# Altium PCB barricelli.PcbDoc (part 5 of 5)
Units mm, origin at the board's own origin, x right, y up, seen from the top; angles counter-clockwise.
Board outline 153 x 153 mm, 8 copper layers (Top Layer, PWR, Mid-Layer 1, Mid-Layer 2, Mid-Layer 3, Mid-Layer 4, GND, Bottom Layer); 168 components, 427 nets, 1233 pads, 911 vias.
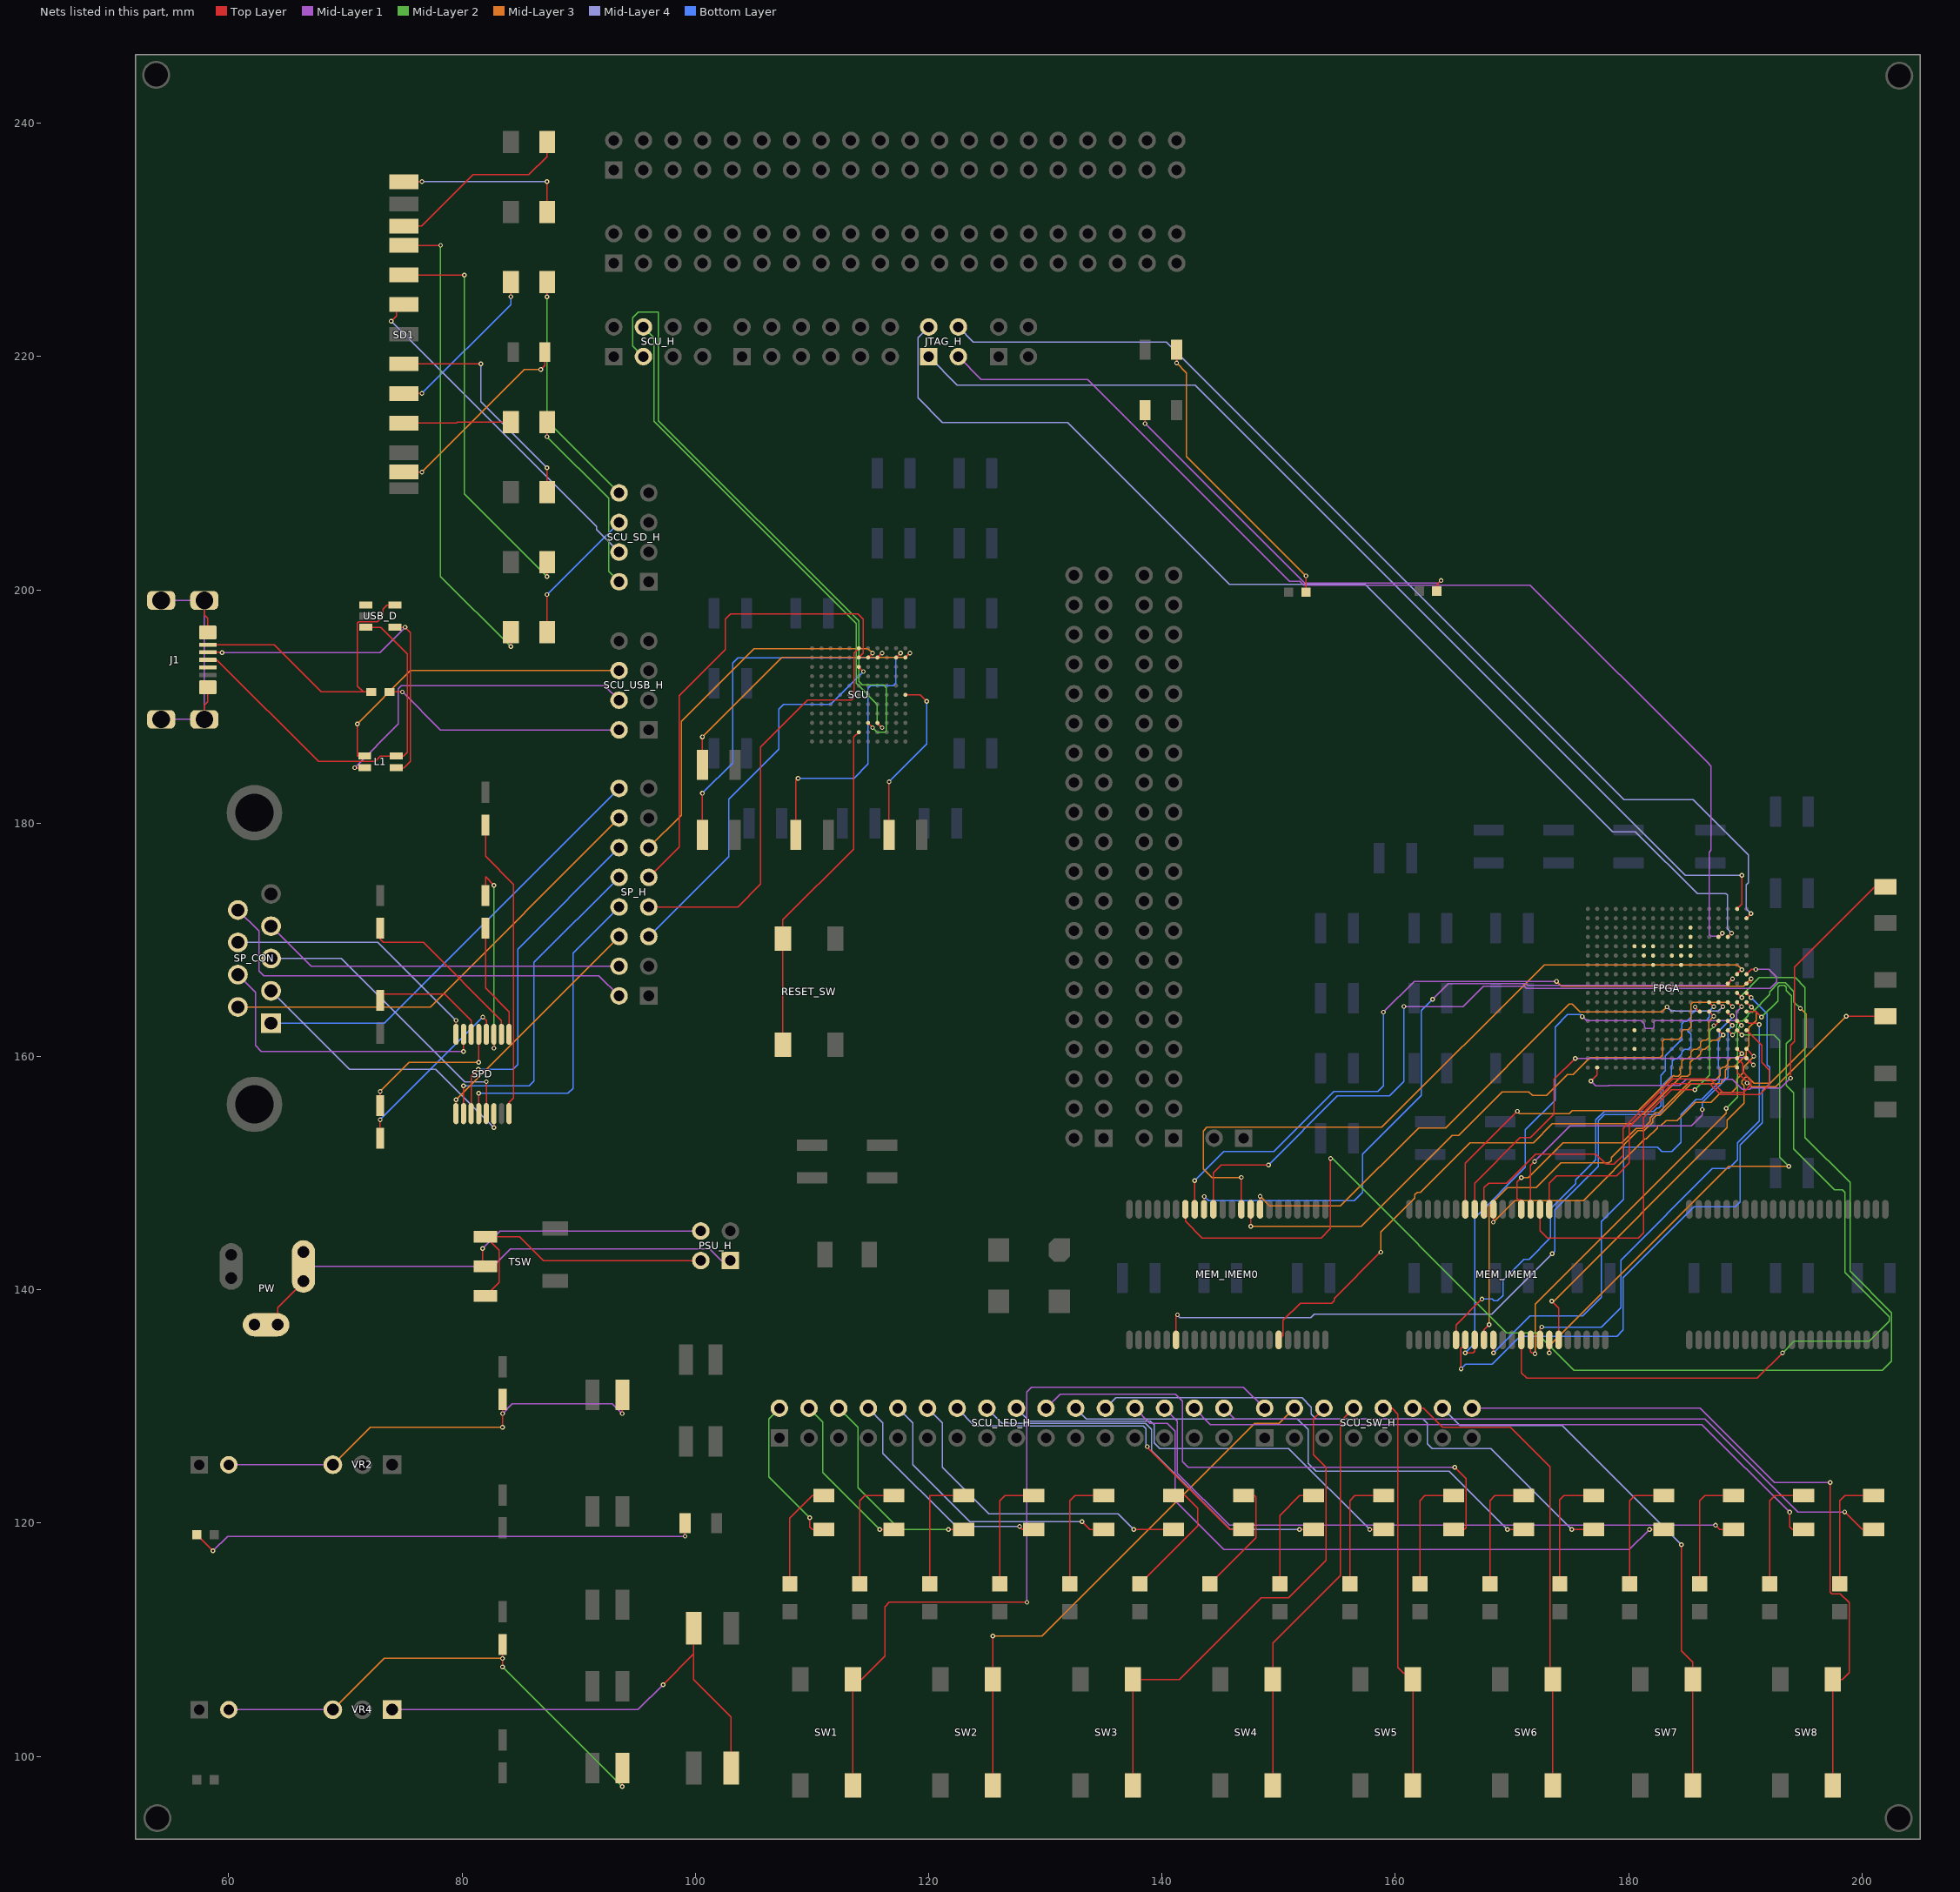
[diagram p11: the nets of this part, all layers, seen from the top]

## Via types
v1: diameter 0.4, hole 0.2, Top Layer to Bottom Layer, tented top, 896 vias
v2: diameter 0.4, hole 0.2, Top Layer to Bottom Layer, 14 vias
v3: diameter 0.6, hole 0.2, Top Layer to Bottom Layer, tented top, 1 vias

## Nets (pads, with @x,y where several pads share a name; then routed paths per layer and width w, separated by ;. In a path a pad name is that pad's centre, name@x,y a point inside that pad or via, vN(x,y) a via of type N, cw(c..) or ccw(c..) an arc to the next point about the centre after c; other vN are vias at no path point) (continued)
INST_MEM0.BUS9: FPGA.L15 MEM_IMEM0.30 | length 49.6
  Top Layer w0.1: MEM_IMEM0.30@148.4,146.9 148.4,147.994 v1(148.412,148.006) ; FPGA.L15@187.7,164.65 v1(188.087,164.262)
  Mid-Layer 3 w0.1: v1(148.412,148.006) 149.225,147.193 155.299,147.193 161.989,153.883 164.296,153.883 174.911,164.497 175.158,164.497 175.826,163.83 182.855,163.83 183.286,164.262 v1(183.3,164.25) v1(183.3,164.25)
  Mid-Layer 4 w0.1: v1(183.3,164.25) v1(183.3,164.25) 183.667,163.881 183.811,163.881 183.855,163.925 183.93,163.925 183.955,163.9 184.17,163.9 184.189,163.881 187.706,163.881 v1(188.087,164.262)
INST_MEM0.BUS10: FPGA.L16 MEM_IMEM0.31 | length 53.8
  Top Layer w0.1: v1(147.6,145.44) MEM_IMEM0.31@147.6,146.9 ; FPGA.L16@188.5,164.65 188.888,164.262 v1(188.9,164.262)
  Mid-Layer 3 w0.1: v1(147.6,145.44) 157.074,145.44 164.88,153.247 165.436,153.247 169.161,156.972 171.43,156.972 171.755,156.647 172.963,156.647 174.771,158.455 175.245,158.455 176.682,159.893 182.677,159.893 182.905,160.122 182.905,161.341 183.032,161.468 184.302,161.468 184.556,161.722 184.556,162.154 184.683,162.281 185.115,162.281 185.344,162.509 185.344,164.49 185.496,164.643 188.519,164.643 v1(188.9,164.262)
INST_MEM0.BUS11: FPGA.H17 MEM_IMEM0.32 | length 62.4
  Top Layer w0.1: MEM_IMEM0.32@146.8,146.9 v1(146.8,149.631) ; FPGA.H17@189.3,167.05 189.712,167.462 v1(189.7,167.45)
  Mid-Layer 3 w0.1: v1(146.8,149.631) 144.272,149.631 143.535,150.368 143.535,153.619 143.84,153.924 158.842,153.924 172.761,167.843 189.332,167.843 189.713,167.462 v1(189.7,167.45)
INST_MEM0.BUS12: FPGA.H18 MEM_IMEM0.35 | length 65.6
  Top Layer w0.1: MEM_IMEM0.35@144.4,146.9 144.4,150.013 145.085,150.698 v1(149.123,150.698) ; FPGA.H18@190.1,167.05 190.512,167.462 v1(190.906,167.462)
  Mid-Layer 1 w0.1: v1(160.731,164.287) 165.791,164.287 167.538,166.034 171.054,166.034 171.257,165.831 192.145,165.831 192.695,166.38 192.695,166.792 192.024,167.462 v1(190.906,167.462)
  Bottom Layer w0.1: v1(149.123,150.698) 155.042,156.616 159.507,156.616 160.731,157.841 v1(160.731,164.287)
INST_MEM0.BUS13: FPGA.J16 MEM_IMEM0.36 | length 61.3
  Top Layer w0.1: MEM_IMEM0.36@143.6,146.9 143.6,147.971 v1(143.623,147.994) ; FPGA.J16@188.5,166.25 v1(188.9,166.649)
  Mid-Layer 1 w0.1: v1(163.195,164.897) 164.532,166.234 171.219,166.234 171.358,166.095 188.345,166.095 v1(188.9,166.649)
  Bottom Layer w0.1: v1(143.623,147.994) 143.993,147.625 156.464,147.625 157.175,148.336 157.175,151.613 162.23,156.667 162.23,163.932 v1(163.195,164.897)
INST_MEM0.BUS14: FPGA.J18 MEM_IMEM0.37 | length 62.1
  Top Layer w0.1: MEM_IMEM0.37@142.8,146.9 v1(142.8,149.352) ; FPGA.J18@190.1,166.25 190.5,166.352 v1(190.5,166.649)
  Mid-Layer 1 w0.1: v1(158.979,163.805) 161.62,166.446 v1(173.812,166.446)
  Mid-Layer 3 w0.1: v1(173.812,166.446) 174.244,166.014 189.865,166.014 v1(190.5,166.649)
  Bottom Layer w0.1: v1(142.8,149.352) 145.289,151.841 149.581,151.841 154.737,156.997 158.496,156.997 158.979,157.48 v1(158.979,163.805)
INST_MEM0.BUS15: FPGA.K17 MEM_IMEM0.38 | length 119.1
  Top Layer w0.1: MEM_IMEM0.38@142,146.9 142,145.898 143.448,144.45 153.641,144.45 154.432,145.241 154.432,151.409 154.45,151.391 v1(154.45,151.25) ; FPGA.K17@189.3,165.45 189.701,165.049 v1(189.713,165.049)
  Mid-Layer 2 w0.1: v1(154.45,151.25) 154.45,151.391 169.545,136.296 172.11,136.296 175.311,133.096 201.752,133.096 202.55,133.894 202.55,138.015 198.984,141.581 198.984,149.189 195.125,153.048 195.125,165.9 194.274,166.751 191.211,166.751 189.713,165.252 v1(189.713,165.049)
INST_MEM0.ENABLE: FPGA.L14 MEM_IMEM0.6 | length 67.8
  Top Layer w0.1: MEM_IMEM0.6@141.2,135.7 v2@141.2,137.75 ; FPGA.L14@186.9,164.65 v1@187.288,164.262
  Mid-Layer 4 w0.1: v2@141.35,137.775 141.525,137.6 152.752,137.6 153.055,137.903 168.253,137.903 v2(173.45,143.1)
  Bottom Layer w0.1: v2@173.533,143.167 173.675,143.309 173.675,146.85 177.4,150.575 177.4,154.496 177.929,155.025 182.362,155.025 182.387,155 182.508,155 182.956,155.448 182.956,157.595 183.662,158.3 183.662,159.187 183.75,159.275 ; 183.749,159.276 183.749,159.596 183.954,159.801 184.146,159.801 184.562,160.216 184.562,160.394 184.767,160.599 185.057,160.599 185.067,160.588 185.334,160.855 185.334,161.922 185.057,162.199 185.026,162.199 ; 185.014,162.204 185.344,162.535 185.344,162.916 185.522,163.093 186.639,163.093 186.919,163.373 186.919,163.881 v1(187.3,164.262)
  other v2: 141.325,137.85
INST_MEM0.WRITE: FPGA.P15 MEM_IMEM0.17 | length 52.3
  Top Layer w0.1: MEM_IMEM0.17@150,135.7 150.375,136.075 150.375,137.37 151.852,138.847 154.545,138.847 154.75,139.052 154.75,139.25 v2@158.725,143.225 ; FPGA.P15@187.7,162.25 v2(188.1,161.85)
  Mid-Layer 3 w0.1: v2(158.75,143.225) 158.75,144.95 161.677,147.877 161.677,148.151 161.882,148.356 162.156,148.356 166.4,152.6 171.837,152.6 173.463,154.226 180.301,154.226 181.1,155.025 181.251,155.025 184.526,158.3 185.045,158.3 185.25,158.505 185.25,159.495 185.555,159.8 185.744,159.8 186.162,160.218 186.162,160.394 186.367,160.599 186.544,160.599 186.95,161.005 186.95,161.195 187.155,161.4 187.625,161.4 v2@188.075,161.85
INST_MEM1.BUS0: FPGA.K18 MEM_IMEM1.7 | length 55.1
  Top Layer w0.1: v1(165.633,133.223) 165.633,135.052 166,135.052 MEM_IMEM1.7@166,135.7 ; FPGA.K18@190.1,165.45 190.297,165.253 ; 190.297,165.252 v1(190.5,165.049)
  Bottom Layer w0.1: v1(165.633,133.223) 166.04,133.629 168.3,133.629 170.688,136.017 178.994,136.017 179.527,136.55 179.527,141.046 185.598,147.117 189.154,147.117 189.56,147.523 189.56,152.425 191.465,154.33 191.465,157.074 192.075,157.683 192.075,159.08 191.872,159.283 191.872,163.678 v1(190.5,165.049)
INST_MEM1.BUS1: FPGA.L17 MEM_IMEM1.8 | length 52
  Top Layer w0.1: v1(165.989,134.595) 166.673,134.595 166.8,134.722 MEM_IMEM1.8@166.8,135.7 ; FPGA.L17@189.3,164.65 v1(189.688,164.262)
  Mid-Layer 1 w0.1: v1(176.025,163.425) 176.046,163.425 176.378,163.093 181.051,163.093 181.356,162.789 181.356,162.515 181.463,162.408 181.747,162.408 181.755,162.4 182.045,162.4 182.162,162.517 182.162,162.983 ; 182.161,162.984 182.27,163.093 189.078,163.093 189.255,163.271 189.255,163.83 v1(189.688,164.262)
  Bottom Layer w0.1: v1(165.989,134.595) 166.802,135.407 166.802,146.152 171.15,150.5 171.15,153.726 173.691,156.266 173.691,162.529 174.766,163.604 175.867,163.604 176.046,163.425 v1(176.025,163.425)
INST_MEM1.BUS2: FPGA.L18 MEM_IMEM1.9 | length 45.1
  Top Layer w0.1: MEM_IMEM1.9@167.6,135.7 167.6,136.561 v1(168.046,137.008) ; FPGA.L18@190.1,164.65 v1(190.52,164.231)
  Mid-Layer 3 w0.1: v1(168.046,137.008) 168.046,147.189 169.6,148.742 172.06,148.742 174.193,150.876 178.004,150.876 178.005,150.875 178.295,150.875 178.5,151.08 178.5,151.338 180.787,153.626 181.316,153.626 182.051,154.36 182.051,154.634 182.373,154.957 182.647,154.957 185.343,157.652 187.913,157.652 187.971,157.71 187.971,157.853 188.275,158.158 188.275,158.825 188.561,159.111 189.045,159.111 189.25,159.316 189.266,159.316 189.849,159.899 189.858,159.899 190.063,160.104 190.063,160.663 190.316,160.916 190.316,162.484 190.926,163.093 190.926,163.824 v1(190.52,164.231)
INST_MEM1.BUS3: FPGA.M16 MEM_IMEM1.10 | length 45.2
  Top Layer w0.1: MEM_IMEM1.10@168.4,135.7 168.4,134.597 v1(168.402,134.595) ; FPGA.M16@188.5,163.85 188.5,163.652 188.671,163.652 188.849,163.474 188.9,163.475 188.875,163.45 v1(188.875,163.475)
  Bottom Layer w0.1: v1(168.402,134.595) 171.552,137.744 176.047,137.744 177.648,139.344 177.648,145.847 179.55,147.749 179.55,152.225 182.474,152.225 182.832,151.867 183.693,151.867 184.48,152.654 184.48,152.975 184.475,152.98 184.475,153.27 184.48,153.275 184.48,155.016 185.807,156.343 186.289,156.343 187.75,157.803 187.75,158.985 187.675,159.06 187.675,161.272 187.75,161.347 187.75,162.225 188.874,163.349 v1(188.875,163.475) ; v1(188.875,163.475) 188.875,163.45 188.9,163.475 v1(188.875,163.475)
INST_MEM1.BUS4: FPGA.M18 MEM_IMEM1.13 | length 75.1
  Top Layer w0.1: MEM_IMEM1.13@170.8,135.7 170.8,132.893 171.283,132.41 191.008,132.41 v1(193.192,134.595) ; FPGA.M18@190.1,163.85 190.912,163.85 v1(191.389,163.373)
  Mid-Layer 2 w0.1: v1(191.389,163.373) 192.786,164.77 192.786,165.958 192.938,166.11 193.345,166.11 193.523,165.933 193.523,165.633 193.954,165.202 193.954,161.519 193.523,161.087 193.523,157.505 194.132,156.896 194.132,152.095 197.663,148.565 198.323,148.565 198.526,148.361 198.526,141.492 202.35,137.668 202.35,137.318 200.617,135.585 194.183,135.585 v1(193.192,134.595)
INST_MEM1.BUS5: FPGA.N17 MEM_IMEM1.14 | length 37.7
  Top Layer w0.1: MEM_IMEM1.14@171.6,135.7 171.6,134.699 171.704,134.595 171.983,134.595 171.975,134.586 v1(171.975,134.525) ; FPGA.N17@189.3,163.05 189.324,163.05 189.699,162.675 v1(189.675,162.675)
  Mid-Layer 2 w0.1: v1(188.366,155.55) 189.332,156.515 189.332,162.112 189.45,162.23 189.45,162.526 189.586,162.662 189.713,162.662 189.699,162.675 v1(189.675,162.675)
  Mid-Layer 3 w0.1: v1(171.975,134.525) 171.983,134.533 171.983,138.753 188.366,155.136 v1(188.366,155.55)
INST_MEM1.BUS6: FPGA.N18 MEM_IMEM1.15 | length 40.1
  Top Layer w0.1: MEM_IMEM1.15@172.4,135.7 172.4,136.652 v1(172.552,136.804) ; FPGA.N18@190.1,163.05 190.311,162.839 191.186,162.839 191.2,162.825 v1(191.2,162.75)
  Bottom Layer w0.1: v1(172.552,136.804) 177.655,136.804 179.324,138.473 179.324,142.545 187.173,150.393 188.57,150.393 189.332,151.155 189.332,152.597 191.186,154.452 191.186,162.839 191.2,162.825 v1(191.2,162.75)
INST_MEM1.BUS7: FPGA.P17 MEM_IMEM1.16 | length 43.7
  Top Layer w0.1: v1(173.2,134.595) MEM_IMEM1.16@173.2,135.7 ; FPGA.P17@189.3,162.25 v1(189.701,161.849)
  Mid-Layer 2 w0.1: v1(189.701,161.849) 192.474,161.849 192.964,161.359 192.964,151.359 v1(193.726,150.597)
  Mid-Layer 3 w0.1: v1(173.2,134.595) 173.2,135.202 188.595,150.597 v1(193.726,150.597)
INST_MEM1.BUS8: FPGA.P18 MEM_IMEM1.29 | length 32.7
  Top Layer w0.1: MEM_IMEM1.29@173.2,146.9 173.2,149.149 173.832,149.781 178.966,149.781 180.061,150.876 180.061,153.978 183.747,157.664 186.938,157.664 187.875,156.727 191.245,156.727 192.069,157.551 192.069,158.825 191.414,159.48 191.414,160.936 FPGA.P18@190.1,162.25
INST_MEM1.BUS9: FPGA.N15 MEM_IMEM1.30 | length 33.3
  Top Layer w0.1: MEM_IMEM1.30@172.4,146.9 172.4,145.085 173.035,144.45 180.848,144.45 181.28,144.882 181.28,154.762 183.667,157.15 v1(185.674,157.15) ; v1(187.3,162.65) 187.362,162.65 187.376,162.636 187.604,162.865 FPGA.N15@187.7,163.05
  Mid-Layer 2 w0.1: v1(185.674,157.15) 186.944,158.42 186.944,162.204 187.376,162.636 187.362,162.65 v1(187.3,162.65)
INST_MEM1.BUS10: FPGA.N16 MEM_IMEM1.31 | length 29.6
  Top Layer w0.1: MEM_IMEM1.31@171.6,146.9 171.6,150.67 v1(171.933,151.003) ; FPGA.N16@188.5,163.05 v1(188.894,162.656)
  Mid-Layer 1 w0.1: v1(171.933,151.003) 174.981,154.051 185.364,154.051 186.316,155.004 v1(186.316,155.455)
  Bottom Layer w0.1: v1(186.316,155.455) 186.316,156.065 188.493,158.242 188.493,162.255 v1(188.894,162.656)
INST_MEM1.BUS11: FPGA.T17 MEM_IMEM1.32 | length 27.7
  Top Layer w0.1: MEM_IMEM1.32@170.8,146.9 170.8,147.707 170.536,147.707 170.414,147.828 170.414,149.231 v1(170.8,149.616) ; FPGA.T17@189.3,160.65 189.701,160.249 v1(189.713,160.249)
  Mid-Layer 3 w0.1: v1(170.8,149.616) 171.383,149.616 174.37,152.603 179.416,152.603 180.638,153.826 181.233,153.826 181.851,154.443 181.851,154.717 182.29,155.157 182.564,155.157 185.354,157.946 187.41,157.946 187.85,158.386 187.85,158.9 188.05,159.1 188.245,159.1 188.493,159.348 188.493,159.614 188.773,159.893 189.357,159.893 v1(189.713,160.249)
INST_MEM1.BUS12: FPGA.T18 MEM_IMEM1.35 | length 31.3
  Top Layer w0.1: v1(168.4,145.796) MEM_IMEM1.35@168.4,146.9 ; FPGA.T18@190.1,160.65 v1(190.729,160.021)
  Mid-Layer 3 w0.1: v1(168.4,145.796) 170.254,147.65 176.125,147.65 181.399,152.924 181.499,152.924 182.456,153.881 182.456,154.057 182.746,154.057 183.207,154.518 184.168,154.518 185.69,156.04 ; 185.476,155.835 185.692,156.05 187.042,156.05 187.9,156.908 188.833,156.908 189.252,157.327 189.252,158.027 189.851,158.626 189.851,159.102 190.729,159.981 v1(190.729,160.021)
INST_MEM1.BUS13: FPGA.U17 MEM_IMEM1.36 | length 34.2
  Top Layer w0.1: MEM_IMEM1.36@167.6,146.9 167.6,148.742 168.006,149.149 169.545,149.149 172.019,151.622 177.19,151.622 178.058,150.755 178.745,150.755 179.527,151.536 179.527,153.819 183.779,158.071 186.937,158.071 188.081,156.927 189.847,156.927 190.5,157.58 190.5,157.87 190.271,158.099 190.271,158.211 189.763,158.719 189.763,159.387 FPGA.U17@189.3,159.85
INST_MEM1.BUS14: FPGA.U18 MEM_IMEM1.37 | length 33.5
  Top Layer w0.1: MEM_IMEM1.37@166.8,146.9 166.8,149.149 170.68,153.029 171.592,153.029 173.615,155.051 173.615,158.044 v1(175.412,159.842) ; FPGA.U18@190.1,159.85 190.686,159.264 v1(190.698,159.264)
  Mid-Layer 1 w0.1: v1(175.412,159.842) 186.147,159.842 186.23,159.925 186.341,159.925 186.367,159.899 190.063,159.899 v1(190.698,159.264)
INST_MEM1.BUS15: FPGA.M14 MEM_IMEM1.38 | length 33.2
  Top Layer w0.1: MEM_IMEM1.38@166,146.9 166,150.848 v1(170.459,155.308) ; FPGA.M14@186.9,163.85 187.3,163.45 v1(187.3,163.449)
  Mid-Layer 3 w0.1: v1(170.459,155.308) 170.663,155.104 174.918,155.104 175.18,155.366 180.841,155.366 183.865,158.39 183.954,158.301 184.244,158.301 184.449,158.506 184.449,158.796 184.36,158.885 184.55,159.075 184.55,159.595 184.755,159.8 185.045,159.8 185.06,159.785 185.349,160.074 185.349,160.396 185.554,160.601 185.876,160.601 186.165,160.89 186.15,160.905 186.15,161.195 186.355,161.4 186.645,161.4 186.66,161.385 186.868,161.593 186.868,163.017 v1(187.3,163.449)
INST_MEM1.ENABLE: FPGA.M13 MEM_IMEM1.6 | length 41.5
  Top Layer w0.1: MEM_IMEM1.6@165.2,135.7 165.2,136.975 v2(167.425,139.2) ; v2@185.675,164.225 186.05,163.85 FPGA.M13@186.1,163.85
  Bottom Layer w0.1: v2@167.475,139.2 168.305,139.2 168.455,139.05 168.745,139.05 169.225,139.53 169.225,140.812 171.037,142.624 171.457,142.624 173.3,144.468 173.3,146.925 175.458,149.083 175.458,149.433 177.186,151.161 177.186,154.564 177.923,155.302 182.15,155.302 182.448,155.6 182.6,155.6 182.756,155.756 182.756,158.385 183.146,158.774 183.146,160.073 184.55,161.477 184.55,162.795 184.755,163 184.958,163 185.35,163.392 185.35,163.595 185.7,163.945 v2(185.7,164.25)
INST_MEM1.WRITE: FPGA.P16 MEM_IMEM1.17 | length 50.3
  Top Layer w0.1: v2(173.4,139.025) 174,138.425 MEM_IMEM1.17@174,135.7 ; FPGA.P16@188.5,162.25 v1(188.9,161.85)
  Mid-Layer 2 w0.1: v1(188.9,161.85) 189.132,162.082 189.132,162.194 189.25,162.313 189.25,162.745 189.53,163.025 189.77,163.025 190.226,163.481 190.226,163.594 190.431,163.799 190.583,163.799 192.08,165.296 192.08,165.535 192.856,166.31 193.428,166.31 194.154,165.584 194.154,164.696 v2(194.725,164.125)
  Mid-Layer 3 w0.1: v2(173.4,139.025) 173.581,139.025 188.448,153.892 188.448,154.553 189.875,155.98 189.875,157.505 189.698,157.682 189.698,157.908 190.011,158.221 190.229,158.221 190.759,157.69 192.111,157.69 195.225,160.805 195.225,163.625 v2(194.725,164.125)
JTAG.TCK: FPGA.A17 JTAG_H.1 | length 91.2
  Top Layer w0.1: FPGA.A17@189.3,172.65 189.713,173.063 v1(189.713,175.539)
  Mid-Layer 4 w0.1: JTAG_H.1@120,220 122.449,217.551 142.831,217.551 184.843,175.539 v1(189.713,175.539)
JTAG.TDI: FPGA.D15 JTAG_H.3 | length 95.5
  Top Layer w0.1: FPGA.D15@187.7,170.25 187.858,170.25 187.858,170.383 v1(188.036,170.561)
  Mid-Layer 1 w0.1: JTAG_H.3@122.54,220 124.506,218.034 133.629,218.034 150.938,200.725 151.817,200.725 152.142,200.4 171.558,200.4 186.893,185.064 ; 186.875,185.075 187.075,184.875 187.075,177.705 186.893,177.523 186.893,170.459 187.053,170.3 187.851,170.3 188.036,170.485 v1(188.036,170.561)
JTAG.TDO: FPGA.D16 JTAG_H.2 | length 97.4
  Top Layer w0.1: FPGA.D16@188.5,170.25 v1(188.824,170.574)
  Mid-Layer 4 w0.1: JTAG_H.2@120,222.54 119.075,221.615 119.075,216.459 121.183,214.351 131.928,214.351 145.796,200.482 157.404,200.482 178.618,179.268 180.574,179.268 185.889,173.953 188.341,173.953 188.456,173.838 188.456,170.941 v1(188.824,170.574)
JTAG.TMS: FPGA.B18 JTAG_H.4 | length 92.3
  Top Layer w0.1: FPGA.B18@190.1,171.85 v1(190.494,172.244)
  Mid-Layer 4 w0.1: JTAG_H.4@122.54,222.54 123.821,221.259 140.36,221.259 179.603,182.016 185.522,182.016 190.263,177.275 190.263,174.906 190.068,174.712 190.068,172.669 v1(190.494,172.244)
LED0: R4.1 SCU_LED_H.2 | length 13.3
  Top Layer w0.1: v1(109.804,120.447) 109.804,119.685 110.039,119.45 R4.1@111,119.45
  Mid-Layer 2 w0.1: SCU_LED_H.2@107.2,129.84 106.299,128.939 106.299,123.952 v1(109.804,120.447)
LED1: R5.1 SCU_LED_H.4 | length 14.1
  Top Layer w0.1: v1(115.799,119.45) R5.1@117,119.45
  Mid-Layer 2 w0.1: SCU_LED_H.4@109.74,129.84 110.922,128.658 110.922,124.327 v1(115.799,119.45)
LED2: R6.1 SCU_LED_H.6 | length 18
  Top Layer w0.1: v1(121.698,119.45) R6.1@123,119.45
  Mid-Layer 2 w0.1: SCU_LED_H.6@112.28,129.84 113.919,128.201 113.919,123.038 117.507,119.45 v1(121.698,119.45)
LED3: R7.1 SCU_LED_H.8 | length 20
  Top Layer w0.1: v1(127.787,119.71) 128.048,119.45 R7.1@129,119.45
  Mid-Layer 4 w0.1: SCU_LED_H.8@114.82,129.84 116.078,128.582 116.078,125.984 122.352,119.71 v1(127.787,119.71)
LED4: R8.1 SCU_LED_H.10 | length 24
  Top Layer w0.1: v1(133.141,120.117) 133.807,119.45 R8.1@135,119.45
  Mid-Layer 4 w0.1: SCU_LED_H.10@117.36,129.84 118.625,128.575 118.625,125.012 123.52,120.117 v1(133.141,120.117)
LED5: R9.1 SCU_LED_H.12 | length 27.6
  Top Layer w0.1: v1(137.573,119.45) R9.1@141,119.45
  Mid-Layer 4 w0.1: SCU_LED_H.12@119.9,129.84 121.158,128.582 121.158,124.79 125.171,120.777 136.246,120.777 v1(137.573,119.45)
LED6: R10.1 SCU_LED_H.14 | length 29.8
  Top Layer w0.1: v1(138.725,126.55) 138.702,126.55 145.802,119.45 R10.1@147,119.45
  Mid-Layer 4 w0.1: SCU_LED_H.14@122.44,129.84 123.94,128.34 138.385,128.34 138.633,128.092 138.633,126.619 138.702,126.55 v1(138.725,126.55)
LED7: R11.1 SCU_LED_H.16 | length 33.4
  Top Layer w0.1: v1(151.79,119.456) 151.797,119.45 R11.1@153,119.45
  Mid-Layer 4 w0.1: SCU_LED_H.16@124.98,129.84 126.28,128.54 138.596,128.54 139.12,128.016 139.12,126.2 145.864,119.456 v1(151.79,119.456)
LED8: R12.1 SCU_LED_H.18 | length 36.7
  Top Layer w0.1: v1(157.81,119.456) 157.816,119.45 R12.1@159,119.45
  Mid-Layer 4 w0.1: SCU_LED_H.18@127.52,129.84 128.62,128.74 139.002,128.74 139.32,128.422 139.32,126.882 139.802,126.4 150.866,126.4 v1(157.81,119.456)
LED9: R13.1 SCU_LED_H.20 | length 47.9
  Top Layer w0.1: R13.1@165,119.45 165.932,119.45 166.065,119.583 166.065,123.825 v1(165.1,124.79)
  Mid-Layer 1 w0.1: SCU_LED_H.20@130.06,129.84 131.259,131.039 141.173,131.039 141.757,130.454 141.757,125.273 142.24,124.79 v1(165.1,124.79)
LED10: R14.1 SCU_LED_H.22 | length 44.4
  Top Layer w0.1: v1(169.602,119.45) R14.1@171,119.45
  Mid-Layer 4 w0.1: SCU_LED_H.22@132.6,129.84 133.5,128.94 151.603,128.94 152.527,128.016 152.527,125.12 153.213,124.435 164.617,124.435 v1(169.602,119.45)
LED11: R15.1 SCU_LED_H.24 | length 48.3
  Top Layer w0.1: v1(175.133,119.45) R15.1@177,119.45
  Mid-Layer 4 w0.1: SCU_LED_H.24@135.14,129.84 136.059,130.759 151.994,130.759 152.806,129.946 152.806,129.337 153.213,128.93 162.382,128.93 162.763,128.549 162.763,126.797 163.17,126.39 168.193,126.39 v1(175.133,119.45)
LED12: R16.1 SCU_LED_H.26 | length 54.6
  Top Layer w0.1: v1(181.788,119.456) 181.794,119.45 R16.1@183,119.45
  Mid-Layer 1 w0.1: SCU_LED_H.26@137.68,129.84 138.971,128.549 140.437,128.549 141.12,127.866 141.12,121.897 145.288,117.729 180.061,117.729 v1(181.788,119.456)
LED13: R17.1 SCU_LED_H.28 | length 55.7
  Top Layer w0.1: v1(187.452,119.812) 187.814,119.45 R17.1@189,119.45
  Mid-Layer 1 w0.1: SCU_LED_H.28@140.22,129.84 141.32,128.74 141.32,124.262 145.771,119.812 v1(187.452,119.812)
LED14: R18.1 SCU_LED_H.30 | length 57.3
  Top Layer w0.1: v1(193.802,120.929) 193.802,119.685 194.037,119.45 R18.1@195,119.45
  Mid-Layer 1 w0.1: SCU_LED_H.30@142.76,129.84 144.152,128.448 186.284,128.448 v1(193.802,120.929)
LED15: R19.1 SCU_LED_H.32 | length 60
  Top Layer w0.1: v1(198.526,120.955) 200.031,119.45 R19.1@201,119.45
  Mid-Layer 1 w0.1: SCU_LED_H.32@145.3,129.84 146.21,128.93 186.538,128.93 194.513,120.955 v1(198.526,120.955)
NetC4_2: C4.2 E8.1 PW_H2.2 VR2.3 | length 39.8
  Top Layer w0.1: v1(83.46,128.219) v1@83.46,129.392 ; E8.1@83.46,130.6 v1@83.46,129.392 ; v1(83.464,129.388) v1@83.46,129.392 ; v1(93.726,129.388) 93.735,129.397 C4.2@93.735,131
  Mid-Layer 1 w0.1: PW_H2.2@60,125 VR2.3@68.92,125 ; v1(83.464,129.388) 84.303,130.226 92.888,130.226 v1(93.726,129.388)
  Mid-Layer 3 w0.1: VR2.3@68.92,125 72.139,128.219 v1(83.46,128.219)
NetC11_2: C11.2 E10.1 PW_H4.2 VR4.3 | length 43.3
  Top Layer w0.1: v1(83.46,107.675) v1(83.46,108.4) E10.1@83.46,109.6 ; v1(93.726,97.409) 93.735,97.418 C11.2@93.735,99
  Mid-Layer 1 w0.1: PW_H4.2@60,104 VR4.3@68.92,104
  Mid-Layer 2 w0.1: v1(83.46,107.675) v1(93.726,97.409)
  Mid-Layer 3 w0.1: VR4.3@68.92,104 73.32,108.4 v1(83.46,108.4)
NetC16_1: C16.1 SCU.F11 | length 14.9
  Top Layer w0.1: C16.1@116.6,179 v1(116.6,183.54) ; SCU.F11@118,191 119.278,191 v1(119.837,190.441)
  Bottom Layer w0.1: v1(116.6,183.54) 119.837,186.778 v1(119.837,190.441)
NetC17_1: C17.1 SCU.B10 | length 23.8
  Top Layer w0.1: C17.1@108.6,179 108.6,183.642 v1(108.803,183.845) ; SCU.B10@117.2,194.2 117.589,194.589 v1(117.602,194.589)
  Bottom Layer w0.1: v1(108.803,183.845) 113.589,183.845 114.808,185.064 114.808,191.567 115.037,191.795 116.967,191.795 117.196,192.024 117.196,194.183 v1(117.602,194.589)
NetC18_1: C18.1 SCU.B8 | length 29.5
  Top Layer w0.1: C18.1@100.6,179 v1(100.6,182.566) ; SCU.B8@115.6,194.2 115.989,194.589 v1(116.002,194.589)
  Bottom Layer w0.1: v1(100.6,182.566) 103.2,185.166 103.2,193.726 103.632,194.158 115.57,194.158 v1(116.002,194.589)
NetC19_1: C19.1 SCU.B11 | length 23.7
  Top Layer w0.1: C19.1@100.6,185 v1(100.6,187.401) ; SCU.B11@118,194.2 v1(118.389,194.589)
  Mid-Layer 3 w0.1: v1(100.6,187.401) 107.407,194.208 118.008,194.208 v1(118.389,194.589)
NetE1_1: E1.1 SPD.1 | length 9.9
  Top Layer w0.1: E1.1@82,171 82,165.862 84.025,163.837 SPD.1@84.025,161.9
NetE1_2: E1.2 SPD.3 | length 17.8
  Top Layer w0.1: E1.2@82,173.8 82,175.404 v1(82.728,174.676) ; SPD.3@82.725,161.9 82.725,160.709 v1(82.728,160.706)
  Mid-Layer 2 w0.1: v1(82.728,160.706) v1(82.728,174.676)
NetE2_1: E2.1 SPD.4 | length 15.6
  Top Layer w0.1: E2.1@72.975,153 v1(72.975,154.584) ; v1(81.776,163.385) 82.075,163.086 SPD.4@82.075,161.9
  Bottom Layer w0.1: v1(72.975,154.584) v1(81.776,163.385)
NetE2_2: E2.2 SPD.5 | length 13.1
  Top Layer w0.1: E2.2@72.975,155.8 v1(72.975,156.997) ; v1(81.425,159.487) SPD.5@81.425,161.9
  Mid-Layer 3 w0.1: v1(72.975,156.997) 75.464,159.487 v1(81.425,159.487)
NetE3_2: E3.2 SPD.6 | length 10.5
  Top Layer w0.1: E3.2@72.975,164.8 72.975,165.354 78.514,165.354 80.775,163.093 SPD.6@80.775,161.9
NetE4_1: E4.1 SPD.2 | length 15.4
  Top Layer w0.1: E4.1@72.975,171 72.975,170.078 73.254,169.799 76.669,169.799 83.375,163.093 SPD.2@83.375,161.9
NetE5_1: E5.1 SPD.16 | length 25.9
  Top Layer w0.1: E5.1@82,179.85 82,177.165 84.404,174.761 84.404,156.439 84.025,156.059 SPD.16@84.025,155.1
NetFPGA_C12: FPGA.C12
NetFPGA_D12: FPGA.D12
NetFPGA_E6: FPGA.E6
NetFPGA_E7: FPGA.E7
NetFPGA_E8: FPGA.E8
NetFPGA_E11: FPGA.E11
NetFPGA_E12: FPGA.E12
NetFPGA_F7: FPGA.F7
NetFPGA_F8: FPGA.F8
NetFPGA_F10: FPGA.F10
NetFPGA_F11: FPGA.F11
NetFPGA_F12: FPGA.F12
NetFPGA_G8: FPGA.G8
NetFPGA_G11: FPGA.G11
NetFPGA_P6: FPGA.P6
NetFPGA_T6: FPGA.T6
NetFPGA_V2: FPGA.V2 R1.1 | length 39.9
  Top Layer w0.1: v1(176.774,157.902) 177.3,158.428 FPGA.V2@177.3,159.05 ; v1(193.878,158.14) 193.878,160.934 194.228,161.284 194.228,167.661 201.117,174.55 R1.1@202,174.55
  Mid-Layer 1 w0.1: v1(176.774,157.902) 177.19,157.486 178.259,157.486 178.288,157.514 184.381,157.514 184.919,158.052 188.87,158.052 189.747,157.175 190.378,157.175 190.493,157.29 193.028,157.29 v1(193.878,158.14)
NetFPGA_V17: FPGA.V17 R2.1 | length 16.3
  Top Layer w0.1: FPGA.V17@189.3,159.05 189.3,158.655 190.15,157.805 v1(190.15,157.725) ; v1(198.653,163.45) R2.1@202,163.45
  Mid-Layer 3 w0.1: v1(190.15,157.725) 190.15,157.805 190.551,157.404 192.607,157.404 v1(198.653,163.45)
NetJ1_1: J1.1 L2.1 USB_D.5 | length 26.1
  Top Layer w0.1: J1.1@58.2,195.3 63.882,195.3 67.932,191.25 71.526,191.25 ; L2.1@72.225,191.25 71.526,191.25 ; USB_D.5@74.25,198.7 73.558,198.7 73.228,198.37 73.228,197.739 72.746,197.256 71.12,197.256 71.018,197.155 71.018,191.758 71.526,191.25
NetJ1_2: J1.2 L1.3 USB_D.4 | length 32.1
  Top Layer w0.1: J1.2@58.2,194.65 59.248,194.65 59.273,194.625 v1(59.425,194.625) ; USB_D.4@74.25,196.8 v1(75.108,196.8) 75.565,196.343 75.565,185.318 74.997,184.75 L1.3@74.35,184.75
  Mid-Layer 1 w0.1: v1(59.425,194.625) 59.273,194.625 59.258,194.64 72.948,194.64 v1(75.108,196.8)
NetJ1_3: J1.3 L1.2 USB_D.3 | length 34
  Top Layer w0.1: J1.3@58.2,194 58.984,194 67.691,185.293 72.543,185.293 73,185.75 L1.2@74.35,185.75 74.981,185.75 75.311,186.08 75.311,194.513 73.024,196.8 USB_D.3@71.75,196.8
NetJ1_4: J1.4
NetJ1_SH: J1.SH | length 23.3
  Top Layer w0.1: J1.SH@57.9,188.9 57.9,190.119 58.2,190.419 J1.SH@58.2,191.65 ; J1.SH@57.9,199.1 57.9,197.861 58.2,197.561 J1.SH@58.2,196.35
  Mid-Layer 1 w0.1: J1.SH@54.2,188.9 J1.SH@57.887,188.9 ; J1.SH@54.2,199.1 J1.SH@57.887,199.1 ; J1.SH@57.9,188.9 J1.SH@57.887,188.9 ; J1.SH@57.9,199.1 J1.SH@57.887,199.1 ; J1.SH@57.887,188.9 J1.SH@57.887,199.1
NetLED2_1: LED2.1 R25.2 | length 44.1
  Top Layer w0.1: LED2.1@57.25,119 v1(58.635,117.615) ; v1(99.11,118.872) R25.2@99.11,120
  Mid-Layer 1 w0.1: v1(58.635,117.615) 59.892,118.872 v1(99.11,118.872)
NetLED5_1: LED5.1 R4.2 | length 9.3
  Top Layer w0.1: LED5.1@108.1,114.8 108.1,120.423 110.027,122.35 R4.2@111,122.35
NetLED6_1: LED6.1 R5.2 | length 10.2
  Top Layer w0.1: LED6.1@114.1,114.8 114.1,121.92 114.53,122.35 R5.2@117,122.35
NetLED7_1: LED7.1 R6.2 | length 10.4
  Top Layer w0.1: LED7.1@120.1,114.8 120.1,122.333 120.117,122.35 R6.2@123,122.35
NetLED8_1: LED8.1 R7.2 | length 10.2
  Top Layer w0.1: LED8.1@126.1,114.8 126.1,121.92 126.53,122.35 R7.2@129,122.35
NetLED9_1: LED9.1 R8.2 | length 10.2
  Top Layer w0.1: LED9.1@132.1,114.8 132.1,121.92 132.53,122.35 R8.2@135,122.35
NetLED10_1: LED10.1 R9.2 | length 11
  Top Layer w0.1: LED10.1@138.1,114.8 143.053,119.753 143.053,121.277 141.98,122.35 R9.2@141,122.35
NetLED11_1: LED11.1 R10.2 | length 10.2
  Top Layer w0.1: LED11.1@144.1,114.8 148.057,118.757 148.057,122.225 147.931,122.35 R10.2@147,122.35
NetLED12_1: LED12.1 R11.2 | length 9.5
  Top Layer w0.1: LED12.1@150.1,114.8 150.1,120.65 151.8,122.35 R11.2@153,122.35
NetLED13_1: LED13.1 R12.2 | length 10.2
  Top Layer w0.1: LED13.1@156.1,114.8 156.1,121.92 156.53,122.35 R12.2@159,122.35
NetLED14_1: LED14.1 R13.2 | length 10.2
  Top Layer w0.1: LED14.1@162.1,114.8 162.1,121.92 162.53,122.35 R13.2@165,122.35
NetLED15_1: LED15.1 R14.2 | length 10.2
  Top Layer w0.1: LED15.1@168.1,114.8 168.1,121.92 168.53,122.35 R14.2@171,122.35
NetLED16_1: LED16.1 R15.2 | length 10.2
  Top Layer w0.1: LED16.1@174.1,114.8 174.1,121.977 174.473,122.35 R15.2@177,122.35
NetLED17_1: LED17.1 R16.2 | length 10.2
  Top Layer w0.1: LED17.1@180.1,114.8 180.1,121.92 180.53,122.35 R16.2@183,122.35
NetLED18_1: LED18.1 R17.2 | length 10.2
  Top Layer w0.1: LED18.1@186.1,114.8 186.1,121.92 186.53,122.35 R17.2@189,122.35
NetLED19_1: LED19.1 R18.2 | length 10.2
  Top Layer w0.1: LED19.1@192.1,114.8 192.1,121.92 192.53,122.35 R18.2@195,122.35
NetLED20_1: LED20.1 R19.2 | length 10.2
  Top Layer w0.1: LED20.1@198.1,114.8 198.1,121.92 198.53,122.35 R19.2@201,122.35
NetLED21_1: LED21.1 R20.2 | length 33.7
  Top Layer w0.1: v1(138.55,214.25) R20.2@138.55,215.4 ; LED21.1@163.658,200.008 LED21.1@163.55,199.9 163.55,200.45 v1@163.9,200.8 ; v1(163.925,200.8) v1@163.925,200.918
  Mid-Layer 1 w0.1: v1@138.55,214.275 152.225,200.6 163.7,200.6 v1@163.9,200.8 ; v1(163.925,200.8) v1@163.925,200.918
NetLED22_1: LED22.1 R21.2 | length 25.4
  Top Layer w0.1: v1(141.25,219.45) R21.2@141.25,220.6 ; LED22.1@152.35,199.8 v1(152.35,201.2)
  Mid-Layer 3 w0.1: v1@141.225,219.475 142.1,218.6 142.1,211.45 v1(152.35,201.2)
NetPSU_H_2: PSU_H.2 TSW.4 TSW.6 | length 25.4
  Top Layer w0.1: TSW.6@82,139.475 83.16,140.635 83.16,143.395 TSW.4@82,144.555 84.912,144.555 86.967,142.5 PSU_H.2@100.46,142.5
NetPSU_H_4: PSU_H.4 TSW.5 | length 21.1
  Top Layer w0.1: v1(81.763,143.535) 81.763,142.015 TSW.5@82,142.015
  Mid-Layer 1 w0.1: v1(81.763,143.535) 83.267,145.04 PSU_H.4@100.46,145.04
NetR29_1: R29.1 R31.2 VR4.1 | length 41.2
  Top Layer w0.1: v1(97.231,106.147) 99.86,108.775 ; R29.1@99.86,111 99.86,108.775 ; R31.2@103.06,99 103.06,103.378 99.86,106.578 99.86,108.775
  Mid-Layer 1 w0.1: VR4.1@74,104 95.085,104 v1(97.231,106.147)
NetR32_2: R32.2 SD1.1 | length 9.2
  Top Layer w0.1: SD1.1@75,214.299 79.527,214.299 79.609,214.381 R32.2@84.18,214.381
NetR33_1: R33.1 SD1.3 | length 20
  Top Layer w0.1: SD1.3@75,219.379 v1(81.61,219.379) ; R33.1@87.28,208.381 v1(87.28,210.464)
  Mid-Layer 4 w0.1: v1(81.61,219.379) 81.61,216.134 v1(87.28,210.464)
NetR34_1: R34.1 SD1.6 | length 35.2
  Top Layer w0.1: SD1.6@75,226.999 v1(80.188,226.999) ; v1(87.274,201.143) 87.28,201.148 R34.1@87.28,202.381
  Mid-Layer 2 w0.1: v1(80.188,226.999) 80.188,208.229 v1(87.274,201.143)
NetR35_2: R35.2 SD1.7 | length 41.3
  Top Layer w0.1: SD1.7@75,229.539 v1(78.156,229.539) ; v1(84.176,195.136) 84.18,195.14 R35.2@84.18,196.381
  Mid-Layer 2 w0.1: v1(78.156,229.539) 78.156,201.156 v1(84.176,195.136)
NetR36_1: R36.1 SD1.8 | length 16
  Top Layer w0.1: SD1.8@75,231.19 76.556,231.19 80.951,235.585 85.725,235.585 87.28,237.14 R36.1@87.28,238.381
NetR37_2: R37.2 SD1.2 | length 14.3
  Top Layer w0.1: SD1.2@75,216.839 v1(76.556,216.839) ; v1(84.18,225.146) R37.2@84.18,226.381
  Bottom Layer w0.1: v1(76.556,216.839) 84.18,224.463 v1(84.18,225.146)
NetR38_1: R38.1 SD1.10 | length 14.9
  Top Layer w0.1: SD1.10@75,235 v1(76.556,235.001) ; R38.1@87.28,232.381 v1(87.28,235.001)
  Mid-Layer 4 w0.1: v1(76.556,235.001) v1(87.28,235.001)
NetR39_1: R39.1 SD1.12 | length 17
  Top Layer w0.1: SD1.12@75,210.108 v1(76.556,210.108) ; v1(86.741,218.897) 87.08,219.236 R39.1@87.08,220.381
  Mid-Layer 3 w0.1: v1(76.556,210.108) 85.345,218.897 v1(86.741,218.897)
NetSP_CON_1: SP_CON.1 SP_H.16 | length 38.2
  Bottom Layer w0.1: SP_CON.1@63.62,162.86 73.34,162.86 SP_H.16@93.46,182.98
NetSP_CON_2: SP_CON.2 SPD.14 | length 25.2
  Top Layer w0.1: v1(82.725,153.899) SPD.14@82.725,155.1
  Mid-Layer 4 w0.1: SP_CON.2@63.62,165.63 70.348,158.902 77.721,158.902 v1(82.725,153.899)
NetSP_CON_3: SP_CON.3 SPD.13 | length 25.6
  Top Layer w0.1: SPD.13@82.075,155.1 v1(82.075,157.836)
  Mid-Layer 4 w0.1: SP_CON.3@63.62,168.4 69.649,168.4 80.213,157.836 v1(82.075,157.836)
NetSP_CON_4: SP_CON.4 SP_H.4 | length 31.3
  Mid-Layer 1 w0.1: SP_CON.4@63.62,171.17 67.05,167.74 SP_H.4@93.46,167.74
NetSP_CON_6: SP_CON.6 SP_H.14 | length 39.4
  Mid-Layer 3 w0.1: SP_CON.6@60.78,164.245 77.265,164.245 SP_H.14@93.46,180.44
NetSP_CON_7: SP_CON.7 SPD.7 | length 26.2
  Top Layer w0.1: v1(80.125,160.426) SPD.7@80.125,161.9
  Mid-Layer 1 w0.1: SP_CON.7@60.78,167.015 62.281,165.514 62.281,160.934 62.789,160.426 v1(80.125,160.426)
NetSP_CON_8: SP_CON.8 SPD.8 | length 22.7
  Top Layer w0.1: SPD.8@79.475,161.9 79.475,163.092 v1(79.477,163.093)
  Mid-Layer 4 w0.1: SP_CON.8@60.78,169.785 72.785,169.785 v1(79.477,163.093)
NetSP_CON_9: SP_CON.9 SP_H.2 | length 37.7
  Mid-Layer 1 w0.1: SP_CON.9@60.78,172.555 62.586,170.749 62.586,167.335 62.992,166.929 91.731,166.929 SP_H.2@93.46,165.2
NetSP_H_6: SP_H.6 SPD.9 | length 21
  Top Layer w0.1: SPD.9@79.475,155.1 v1(79.475,156.295)
  Mid-Layer 3 w0.1: v1(79.475,156.295) SP_H.6@93.46,170.28
NetSP_H_8: SP_H.8 SPD.12 | length 27.2
  Top Layer w0.1: SPD.12@81.425,155.1 v1(81.425,156.845)
  Bottom Layer w0.1: v1(81.425,156.845) 89.078,156.845 89.51,157.277 89.51,168.87 SP_H.8@93.46,172.82
NetSP_H_10: SP_H.10 SPD.10 | length 29.1
  Top Layer w0.1: SPD.10@80.125,155.1 v1(80.125,157.48)
  Bottom Layer w0.1: v1(80.125,157.48) 85.75,157.48 86.157,157.886 86.157,168.057 SP_H.10@93.46,175.36
NetSP_H_12: SP_H.12 SPD.11 | length 29.8
  Top Layer w0.1: SPD.11@80.775,155.1 80.775,158.293 v1(81.385,158.902)
  Bottom Layer w0.1: v1(81.385,158.902) 84.353,158.902 84.76,159.309 84.76,169.2 SP_H.12@93.46,177.9
NetUSB_D_1: USB_D.1
RESETN: RESET_SW.1 RESET_SW.2 SCU.K6 | length 29.5
  Top Layer w0.1: RESET_SW.2@107.5,161 107.5,165.532 RESET_SW.1@107.5,170.1 107.5,171.711 113.575,177.786 113.575,187.375 SCU.K6@114,187.8
SD.CLK: SCU_SD_H.4 SD1.5 | length 30.1
  Top Layer w0.1: v1(73.914,223.037) 74.371,223.495 74.371,224.459 SD1.5@75,224.459
  Mid-Layer 4 w0.1: v1(73.914,223.037) 91.516,205.435 91.516,205.184 SCU_SD_H.4@93.46,203.24
SD.CS: R32.1 SCU_SD_H.2 | length 16.2
  Top Layer w0.1: v1(87.274,213.131) 87.28,213.137 R32.1@87.28,214.381
  Mid-Layer 2 w0.1: v1(87.274,213.131) 92.558,207.848 92.558,201.602 SCU_SD_H.2@93.46,200.7
SD.DI: R37.1 SCU_SD_H.8 | length 20.6
  Top Layer w0.1: v1(87.274,225.12) 87.28,225.126 R37.1@87.28,226.381
  Mid-Layer 2 w0.1: v1(87.274,225.12) 87.274,214.506 SCU_SD_H.8@93.46,208.32
SD.DO: R35.1 SCU_SD_H.6 | length 12
  Top Layer w0.1: R35.1@87.28,196.381 v1(87.28,199.6)
  Bottom Layer w0.1: v1(87.28,199.6) SCU_SD_H.6@93.46,205.78
SW0: SCU_SW_H.2 SW1.1 SW1.2 | length 68.5
  Top Layer w0.1: SW1.1@113.5,97.5 SW1.2@113.5,106.6 114.22,106.6 116.23,108.61 116.23,112.801 116.637,113.208 v1(128.422,113.208)
  Mid-Layer 1 w0.1: v1(128.422,113.208) 128.422,131.242 128.829,131.648 146.992,131.648 SCU_SW_H.2@148.8,129.84
SW1: SCU_SW_H.4 SW2.1 SW2.2 | length 46.7
  Top Layer w0.1: SW2.1@125.5,97.5 SW2.2@125.5,106.6 v1(125.5,110.312)
  Mid-Layer 3 w0.1: v1(125.5,110.312) 129.692,110.312 147.93,128.549 150.049,128.549 SCU_SW_H.4@151.34,129.84
SW2: SCU_SW_H.6 SW3.1 SW3.2 | length 43.7
  Top Layer w0.1: SW3.1@137.5,97.5 SW3.2@137.5,106.6 141.474,106.6 148.488,113.614 150.851,113.614 154.051,116.815 154.051,124.765 152.959,125.857 152.959,128.919 SCU_SW_H.6@153.88,129.84
SW3: SCU_SW_H.8 SW4.1 SW4.2 | length 35.2
  Top Layer w0.1: SW4.1@149.5,97.5 SW4.2@149.5,106.6 149.5,109.703 155.296,115.498 155.296,128.716 SCU_SW_H.8@156.42,129.84
SW4: SCU_SW_H.10 SW5.1 SW5.2 | length 34
  Top Layer w0.1: SCU_SW_H.10@158.96,129.84 159.715,129.84 160.223,129.332 160.223,107.645 161.29,106.578 SW5.2@161.5,106.578 ; SW5.1@161.5,97.5 SW5.2@161.5,106.578 ; SW5.2@161.5,106.6 SW5.2@161.5,106.578
SW5: SCU_SW_H.12 SW6.1 SW6.2 | length 41.4
  Top Layer w0.1: SCU_SW_H.12@161.5,129.84 162.412,129.84 164.033,128.219 169.875,128.219 173.279,124.816 173.279,106.578 SW6.2@173.5,106.578 ; SW6.1@173.5,97.5 SW6.2@173.5,106.578 ; SW6.2@173.5,106.6 SW6.2@173.5,106.578
SW6: SCU_SW_H.14 SW7.1 SW7.2 | length 46.4
  Top Layer w0.1: v1(184.531,118.135) 184.531,109.046 185.5,108.077 SW7.2@185.5,106.6 SW7.1@185.5,97.5
  Mid-Layer 4 w0.1: SCU_SW_H.14@164.04,129.84 165.532,128.348 174.318,128.348 v1(184.531,118.135)
SW7: SCU_SW_H.16 SW8.1 SW8.2 | length 61.5
  Top Layer w0.1: v1(197.282,123.469) 197.282,114.071 197.409,113.944 198.145,113.944 198.907,113.182 198.907,107.184 198.323,106.6 SW8.2@197.5,106.6 SW8.1@197.5,97.5
  Mid-Layer 1 w0.1: SCU_SW_H.16@166.58,129.84 186.136,129.84 192.507,123.469 v1(197.282,123.469)
"TOGGLE OUT": PSU_H.1 PW.1 PW.1A PW.1B PW.3 PW.3A PW.3B | length 51.8
  Top Layer w0.1: PW.3B@64.2,137 64.2,138.475 PW.1@66.475,140.75 ; PW.1A@66.4,140.75 PW.1@66.4,142 PW.1B@66.4,143.25
  Mid-Layer 1 w0.1: PW.3A@62.2,137 PW.3@62.281,137 ; PW.3B@64.2,137 PW.3@64.11,137 ; PW.1@66.4,142 82.652,142 84.162,143.51 101.219,143.51 102.229,142.5 PSU_H.1@103,142.5 ; PW.3@62.281,137 62.281,136.195 62.814,136.195 PW.3@63.619,137 ; PW.3@62.281,137 PW.3@62.807,137 ; PW.3@62.807,137 PW.3@63.2,137 PW.3@63.619,137 ; PW.3@62.807,137 63.627,137.82 64.11,137.82 PW.3@64.11,137 ; PW.3@63.619,137 PW.3@64.11,137
UART0.CTRL_RX: SCU.C6 SP_H.5 | length 33.3
  Top Layer w0.1: SCU.C6@114,193.4 v1(114.402,192.998)
  Bottom Layer w0.1: SP_H.5@96,170.28 102.845,177.125 102.845,182.067 107.137,186.36 107.137,189.789 107.544,190.195 111.598,190.195 v1(114.402,192.998)
UART0.CTRL_TX: SCU.B6 SP_H.9 | length 40.5
  Top Layer w0.1: SP_H.9@96,175.36 98.603,177.963 98.603,190.932 102.565,194.894 102.565,197.51 102.997,197.942 113.944,197.942 114.376,197.51 114.376,194.576 SCU.B6@114,194.2
UART0.RX: SCU.A6 SP_H.7 | length 36.3
  Top Layer w0.1: SP_H.7@96,172.82 103.632,172.82 105.588,174.776 105.588,186.538 109.626,190.576 113.386,190.576 113.589,190.779 113.589,194.589 SCU.A6@114,195
UART0.TX: SCU.B7 SP_H.11 | length 31.7
  Top Layer w0.1: SCU.B7@114.8,194.2 v1(115.189,194.589)
  Mid-Layer 3 w0.1: SP_H.11@96,177.9 98.781,180.681 98.781,188.722 105.029,194.97 114.808,194.97 v1(115.189,194.589)
UART1.RX: SCU.J8 SCU_H.4 | length 43.4
  Top Layer w0.1: SCU.J8@115.6,188.6 116.002,188.198 v1(116.002,188.189)
  Mid-Layer 2 w0.1: SCU_H.4@95.54,222.54 96.444,221.636 96.444,214.478 113.792,197.129 113.792,191.999 115.595,190.195 115.595,188.595 v1(116.002,188.189)
UART1.TX: SCU.J7 SCU_H.3 | length 53.2
  Top Layer w0.1: SCU.J7@114.8,188.6 115.189,188.211 v1(115.189,188.189)
  Mid-Layer 2 w0.1: SCU_H.3@95.54,220 94.615,220.925 94.615,223.342 95.098,223.825 96.799,223.825 96.825,223.799 96.825,214.503 113.995,197.333 113.995,192.151 114.3,191.846 116.129,191.846 116.357,191.618 116.357,187.909 116.23,187.782 115.595,187.782 v1(115.189,188.189)
USB.DM: L1.4 SCU_USB_H.4 | length 28.8
  Top Layer w0.1: v1(70.79,184.76) 70.799,184.75 L1.4@71.65,184.75
  Mid-Layer 1 w0.1: v1(70.79,184.76) 74.524,188.493 74.524,191.541 74.778,191.795 92.205,191.795 SCU_USB_H.4@93.46,190.54
USB.DP: L1.1 SCU_USB_H.6 | length 27.7
  Top Layer w0.1: v1(71.018,188.519) 71.018,185.75 L1.1@71.65,185.75
  Mid-Layer 3 w0.1: v1(71.018,188.519) 75.58,193.08 SCU_USB_H.6@93.46,193.08
USB.VBUS_ENABLE: L2.2 SCU_USB_H.2 | length 21
  Top Layer w0.1: L2.2@73.775,191.25 v1(74.879,191.25)
  Mid-Layer 1 w0.1: v1(74.879,191.25) 78.129,188 SCU_USB_H.2@93.46,188
pads on no net: J1.0 SCU.E5 SCU.E6 SCU.E7 SCU.F5 SCU.F6 SCU.F7 SCU.G5 SCU.G6 SCU.G7 SD1.9 SD1.13 TSW.
copper on no net: | length 1.8
  Top Layer w0.1: 141.199,134.595 141.2,134.596
  Top Layer w0.254: 120.85,131.55 120.85,133.375

## Polygon pours and split planes (outlines as drawn)
1.2V on PWR (split plane): 185.821,166.696 185.821,163.75 185.83,163.7 185.858,163.658 196.521,152.996 196.521,152.055 164.35,152.055 164.3,152.045 164.258,152.017 113.296,101.055 91.125,101.055 91.075,101.045 91.033,101.017 87.821,97.804 80.329,97.804 77.117,101.017 77.075,101.045 77.025,101.055 70.454,101.055 70.454,106.046 72.029,107.621 83.8,107.621 83.85,107.63 83.892,107.658 90.879,114.645 124.6,114.645 124.65,114.655 124.692,114.683 163.154,153.146 188.6,153.146 188.65,153.155 188.692,153.183 189.742,154.233 189.77,154.275 189.78,154.325 189.779,154.325 189.779,156.825 189.77,156.875 189.742,156.917 186.396,160.262 186.617,160.483 186.645,160.525 186.654,160.575 186.654,161.525 186.645,161.575 186.617,161.617 186.079,162.154 186.079,162.25 186.07,162.3 186.042,162.342 185.642,162.742 185.6,162.77 185.55,162.779 185.5,162.77 185.458,162.742 185.45,162.729 184.429,162.729 182.754,164.404 182.712,164.432 182.662,164.442 182.613,164.432 182.571,164.404 181.254,163.088 181.254,164.971 181.892,165.608 181.92,165.65 181.929,165.7 181.929,167.546 184.971,167.546
3.3V on PWR (split plane): 204.49,93.41 52.51,93.41 52.51,189.598 52.6,189.59 56.327,189.59 56.33,189.589 56.363,189.584 56.38,189.584 56.397,189.583 56.43,189.586 56.463,189.587 56.672,189.614 56.688,189.618 56.705,189.62 56.737,189.63 56.77,189.637 56.785,189.644 56.801,189.649 56.995,189.73 57.01,189.737 57.026,189.743 57.054,189.761 57.084,189.777 57.097,189.787 57.111,189.796 57.278,189.924 57.29,189.936 57.304,189.946 57.327,189.97 57.351,189.993 57.361,190.006 57.372,190.019 57.5,190.186 57.509,190.2 57.52,190.213 57.536,190.242 57.553,190.271 57.559,190.286 57.567,190.301 57.648,190.496 57.652,190.512 57.659,190.527 57.667,190.56 57.677,190.592 57.678,190.608 57.682,190.625 57.71,190.833 57.711,190.867 57.714,190.901 57.707,197.031 57.707,197.034 57.713,197.067 57.712,197.083 57.714,197.1 57.711,197.133 57.71,197.167 57.682,197.375 57.678,197.392 57.677,197.408 57.667,197.44 57.659,197.473 57.652,197.488 57.648,197.504 57.567,197.699 57.559,197.714 57.553,197.729 57.536,197.758 57.52,197.787 57.509,197.8 57.5,197.814 57.372,197.981 57.361,197.994 57.351,198.007 57.327,198.03 57.304,198.054 57.29,198.064 57.278,198.076 57.111,198.204 57.097,198.213 57.084,198.223 57.054,198.239 57.026,198.257 57.01,198.263 56.995,198.27 56.801,198.351 56.785,198.356 56.77,198.363 56.737,198.37 56.705,198.38 56.688,198.382 56.672,198.385 56.463,198.413 56.429,198.414 56.396,198.417 52.599,198.41 52.55,198.406 52.51,198.402 52.51,245.39 204.49,245.39
GND on GND (split plane): 204.49,93.41 52.51,93.41 52.51,189.598 52.6,189.59 56.327,189.59 56.33,189.589 56.363,189.584 56.38,189.584 56.397,189.583 56.43,189.586 56.463,189.587 56.672,189.614 56.688,189.618 56.705,189.62 56.737,189.63 56.77,189.637 56.785,189.644 56.801,189.649 56.995,189.73 57.01,189.737 57.026,189.743 57.054,189.761 57.084,189.777 57.097,189.787 57.111,189.796 57.278,189.924 57.29,189.936 57.304,189.946 57.327,189.97 57.351,189.993 57.361,190.006 57.372,190.019 57.5,190.186 57.509,190.2 57.52,190.213 57.536,190.242 57.553,190.271 57.559,190.286 57.567,190.301 57.648,190.496 57.652,190.512 57.659,190.527 57.667,190.56 57.677,190.592 57.678,190.608 57.682,190.625 57.71,190.833 57.711,190.867 57.714,190.901 57.707,197.031 57.707,197.034 57.713,197.067 57.712,197.083 57.714,197.1 57.711,197.133 57.71,197.167 57.682,197.375 57.678,197.392 57.677,197.408 57.667,197.44 57.659,197.473 57.652,197.488 57.648,197.504 57.567,197.699 57.559,197.714 57.553,197.729 57.536,197.758 57.52,197.787 57.509,197.8 57.5,197.814 57.372,197.981 57.361,197.994 57.351,198.007 57.327,198.03 57.304,198.054 57.29,198.064 57.278,198.076 57.111,198.204 57.097,198.213 57.084,198.223 57.054,198.239 57.026,198.257 57.01,198.263 56.995,198.27 56.801,198.351 56.785,198.356 56.77,198.363 56.737,198.37 56.705,198.38 56.688,198.382 56.672,198.385 56.463,198.413 56.429,198.414 56.396,198.417 52.599,198.41 52.55,198.406 52.51,198.402 52.51,245.39 204.49,245.39

## Other copper
PWR (plane layer: these items are gaps in the copper):
  lines w0.254: 161.387,151.563 163.1,153.275 ; 185.525,162.6 184.375,162.6 182.662,164.312 181.325,162.975 181.325,162.6 181.125,162.8 181.125,165.025 181.8,165.7 181.8,167.675 185.025,167.675 185.95,166.75 185.95,163.75 196.65,153.05 196.65,151.925 164.35,151.925 113.35,100.925 91.125,100.925 87.875,97.675 80.275,97.675 77.025,100.925 70.35,100.925 70.325,100.95 70.325,106.1 71.975,107.75 83.8,107.75 90.825,114.775 124.6,114.775 163.1,153.275 ; 185.55,162.65 185.95,162.25 185.95,162.1 186.525,161.525 186.525,160.575 186.225,160.275 ; 186.2,160.275 189.65,156.825 189.65,154.325 188.6,153.275 163.1,153.275

## Silkscreen, mask and mechanical layers (free items; w line width, h text height)
Top Overlay:
  drawing of 46 lines, arcs and shapes, not listed
  text "FPGA A" at 92,240.5 h1.52
  text "Sigve Sebastian Farstad" at 171.875,240.39 h2.3
  text "SD" at 64.2,238.1 h1.52
  text "Fedor Olegovich Fadeev" at 173.112,237.215 h2.3
  text "Bjørn Åge Tungesvik" at 175.568,234.04 h2.3
  text "FPGA B" at 92,232.5 h1.52
  text "Odd Magnus Trondrud" at 177.443,230.865 h2.3
  text "BARRICELLI" at 150.39,228.96 h4
  text "Per Thomas Lundal" at 179.413,227.69 h2.3
  text "SCU" at 92,224.5 h1.52
  text "POWER" at 103,224.5 h1.52
  text "JTAG" at 118.5,224.5 h1.52
  text "FPGA C" at 125,224.5 h1.52
  text "Torbjørn Langland" at 181.222,224.515 h2.3
  text "Emil Taylor Bye" at 183.111,221.34 h2.3
  text "Eirik Flogard" at 185.535,218.165 h2.3
  text "Rune Holmgren" at 186.839,214.99 h2.3
  text "Péter Gombos" at 188.816,211.815 h2.3
  text "SD" at 94.5,210 h1.52
  text "USB" at 53.75,200.75 h1.52
  text "USB" at 93,197.3 h1.52
  text "NTNU" at 191.03,188.32 h4
  text "SERIAL" at 89,184.7 h1.52
  text "Datamaskinprosjektet" at 174.52,181.335 h2.8
  text "2013" at 184.045,178.795 h2.8
  text "RESET" at 106.5,172 h1.52
  text "FPGA TO SCU JUMPERS" at 130.8,162.9 h1.52 r90
  text "POWER" at 98.3,148.7 h1.52
  text "DATA MEMORY" at 185.4,148.5 h1.52
  text "INST. MEMORY 0" at 135.5,148.4 h1.52
  text "INST. MEMORY 1" at 159.7,148.4 h1.52
  text "POWER" at 81.8,147.2 h1.52
  text "POWER IN" at 54.05,146.975 h1.52
  text "JUMPERS" at 96.8,146.7 h1.52
  text "USER LED JUMPERS" at 114.3,131.5 h1.52
  text "SWITCH JUMPERS" at 147.4,131.5 h1.52
  text "3.3V" at 66.3,130.5 h5
  text "D5" at 107,116.5 h1.52
  text "D6" at 113,116.5 h1.52
  text "D7" at 119,116.5 h1.52
  text "D8" at 125,116.5 h1.52
  text "D9" at 131,116.5 h1.52
  text "D10" at 137,116.5 h1.52
  text "D11" at 143,116.5 h1.52
  text "D12" at 149,116.5 h1.52
  text "D13" at 155,116.5 h1.52
  text "D14" at 161,116.5 h1.52
  text "D15" at 167,116.5 h1.52
  text "D16" at 173,116.5 h1.52
  text "D17" at 179,116.5 h1.52
  text "D18" at 185,116.5 h1.52
  text "D19" at 191,116.5 h1.52
  text "D20" at 197,116.5 h1.52
  text "1.2V" at 66.3,109.5 h5
Mechanical 16:
  lines w0.2: 51.4,92.275 205.4,92.275 ; 51.4,92.325 51.4,246.275 205.375,246.275 ; 205.425,92.325 205.425,246.325

## Text inside footprints (layer, text, board x,y; h text height)
E3: Top Overlay "+" at 71.197,161.495 h1.52; Top Overlay "-" at 71.197,163.781 h1.52
E4: Top Overlay "+" at 71.197,170.495 h1.52; Top Overlay "-" at 71.197,172.781 h1.52
E5: Top Overlay "+" at 80.222,179.345 h1.52; Top Overlay "-" at 80.222,181.631 h1.52
E8: Top Overlay "+" at 81.682,130.095 h1.52; Top Overlay "-" at 81.682,132.381 h1.52
E9: Top Overlay "+" at 81.682,119.095 h1.52; Top Overlay "-" at 81.682,121.381 h1.52
E10: Top Overlay "+" at 81.682,109.095 h1.52; Top Overlay "-" at 81.682,111.381 h1.52
E11: Top Overlay "+" at 81.682,98.095 h1.52; Top Overlay "-" at 81.682,100.381 h1.52
SP_CON: Top Overlay "6" at 57.675,163.745 h1.5 r90; Top Overlay "9" at 57.675,172.055 h1.5 r90; Top Overlay "5" at 67.075,173.44 h1.5 r90; Top Overlay "1" at 67.075,162.61 h1.5 r90